# Altium PCB Tow_FOC.PcbDoc (part 2 of 3)
Units mil, origin at the board's own origin, x right, y up, seen from the top; angles counter-clockwise.
Board outline 3149.61 x 2165.35 mil, 4 copper layers (Top Layer, Layer 1, Layer 2, Bottom Layer), stack 23.756 mil thick; 186 components, 138 nets, 677 pads, 434 vias.
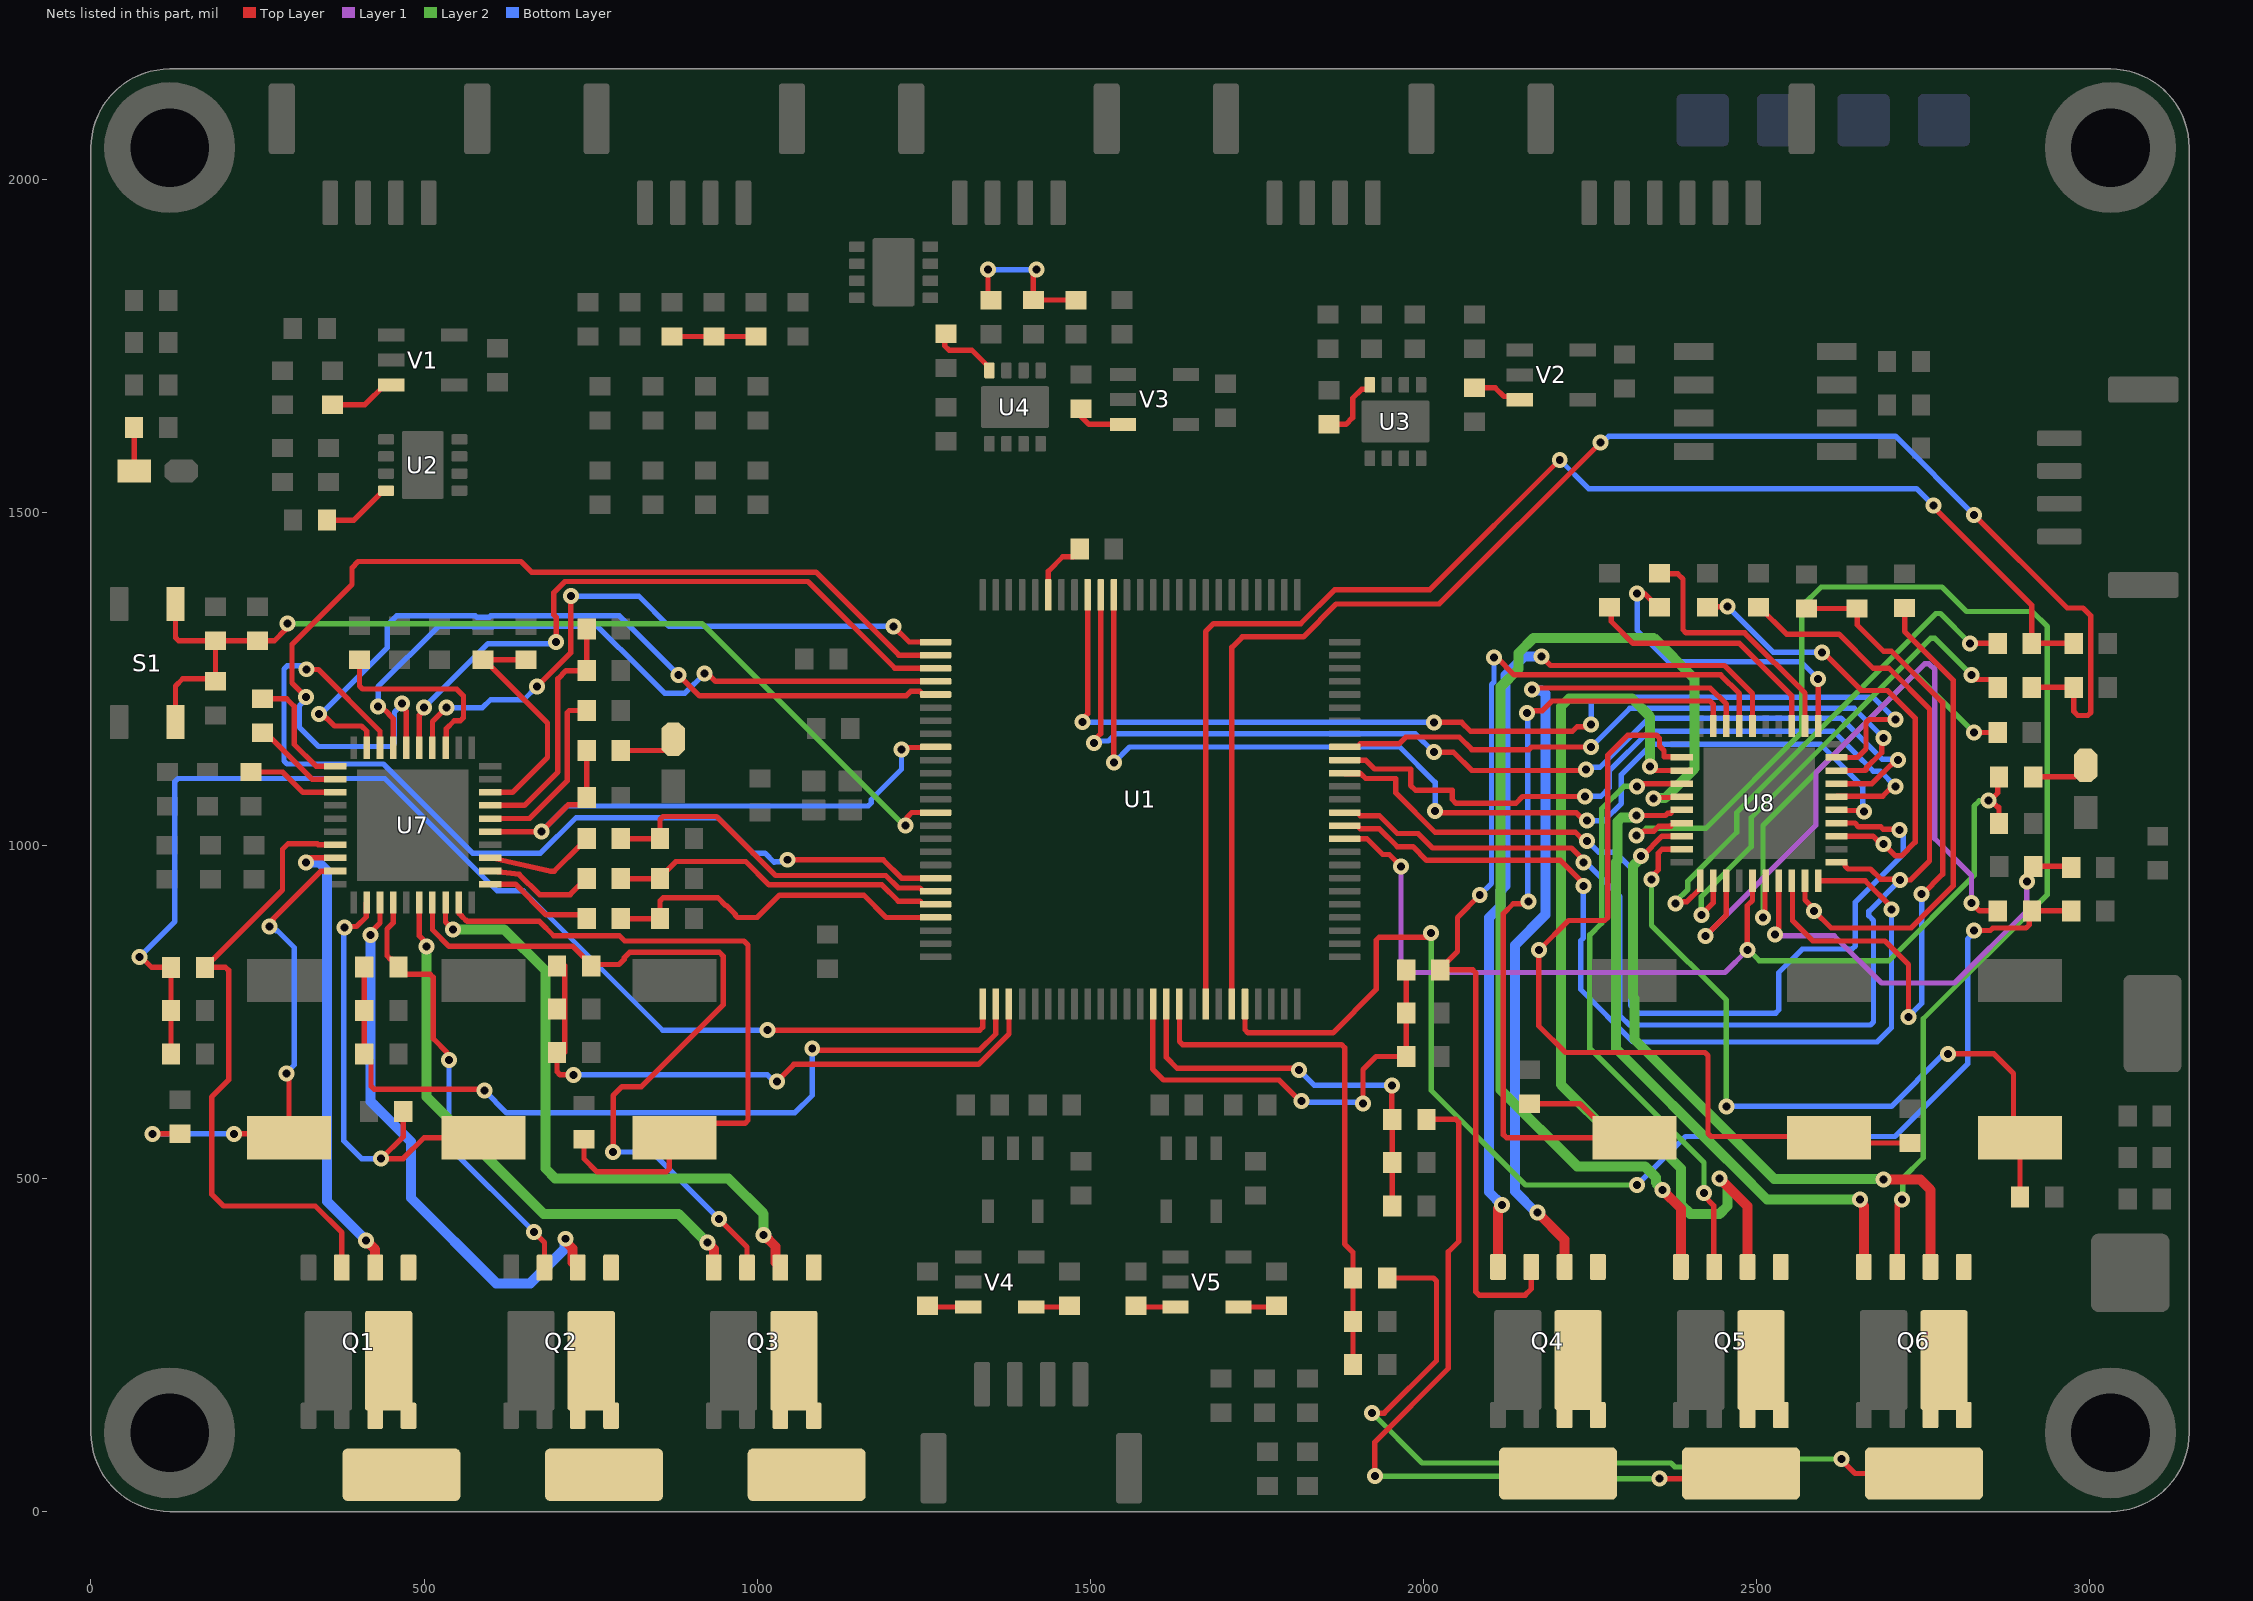
[diagram p4: the nets of this part, all layers, seen from the top]

## Via types
v1: diameter 24, hole 12, Top Layer to Bottom Layer, tented both sides, 434 vias

## Nets (pads, with @x,y where several pads share a name; then routed paths per layer and width w, separated by ;. In a path a pad name is that pad's centre, name@x,y a point inside that pad or via, vN(x,y) a via of type N, cw(c..) or ccw(c..) an arc to the next point about the centre after c; other vN are vias at no path point) (continued)
M1_GHC: Q3.4 U7.16 | length 849.9
  Top Layer w8: U7.16@492.87,914.22 492.87,863.82 503.94,852.75 v1(503.94,848.43)
  Top Layer w15: v1(925.2,403.54) 934.84,393.9 Q3.4@934.84,366.14
  Layer 2 w15: v1(503.94,848.43) 503.94,622.05 679.13,446.85 881.89,446.85 v1(925.2,403.54)
M1_GLA: Q1.2 U7.8 | length 709.4
  Top Layer w8: v1(322.83,974.41) 329.57,981.14 U7.8@366.89,981.14
  Top Layer w15: v1(412.9,407.13) 426.57,393.45 Q1.2@426.57,366.14
  Bottom Layer w15: v1(322.83,974.41) 342.1,974.41 354.33,962.18 354.33,465.69 v1(412.9,407.13)
M1_GLB: Q2.2 U7.13 | length 846.8
  Top Layer w8: v1(419.63,865.03) 419.63,869.36 433.97,883.7 433.97,914.06 U7.13@433.82,914.22
  Top Layer w15: v1(712.6,409.45) 712.6,405.12 722.9,394.82 722.9,373.95 Q2.2@730.71,366.14
  Bottom Layer w15: v1(419.63,865.03) 419.63,615.81 480.32,555.12 480.32,470.47 608.27,342.52 659.45,342.52 710.52,393.59 710.52,407.37 v1(712.6,409.45)
M1_GLC: Q3.2 U7.18 | length 953.4
  Top Layer w8: U7.18@532.24,914.22 532.24,885.08 v1(543.31,874.02)
  Top Layer w15: v1(1009.84,415.35) 1027.37,397.83 1027.37,373.61 Q3.2@1034.84,366.14
  Layer 2 w15: v1(543.31,874.02) 620.08,874.02 682.09,812.01 682.09,514.76 696.85,500 956.69,500 1009.84,446.85 v1(1009.84,415.35)
M1_IDRIVE: R43.2 R51.1 U7.27 | length 372.7
  Top Layer w8: U7.27@599.17,1059.89 599.25,1059.96 650.52,1059.96 700.79,1110.24 700.79,1249.89 713.19,1262.29 R43.2@744.09,1262.29 R51.1@744.09,1324.42
M1_INHA: U1.1 U7.34 | length 950.5
  Top Layer w8: U7.34@512.56,1146.5 512.56,1185.78 v1(533.46,1206.69) ; v1(669.29,1238.19) 720.31,1289.21 720.31,1373.85 v1(720.47,1374.02) ; v1(1204.72,1328.74) 1228.35,1305.12 U1.1@1267.72,1305.12
  Bottom Layer w8: v1(533.46,1206.69) 587.79,1206.69 599.61,1218.5 649.61,1218.5 v1(669.29,1238.19) ; v1(720.47,1374.02) 822.28,1374.02 867.56,1328.74 v1(1204.72,1328.74)
M1_INHB: U1.2 U7.36 | length 1515
  Top Layer w8: v1(322.83,1222.44) 301.69,1243.58 301.69,1301.69 391.73,1391.73 391.73,1416.57 401.11,1425.95 645.48,1425.95 661.42,1410.02 1088.02,1410.02 1212.6,1285.43 ; v1(466.54,1212.6) 466.54,1208.27 473.19,1201.62 U7.36@473.19,1146.5 ; 1214.57,1285.43 U1.2@1267.72,1285.43
  Bottom Layer w8: v1(322.83,1222.44) 322.83,1219.6 312.99,1209.75 312.99,1177.17 341.69,1148.47 451.02,1148.47 455.7,1153.15 455.7,1199.91 466.54,1210.74 v1(466.54,1212.6)
M1_INHC: U1.19 U7.38 | length 1447.9
  Top Layer w8: v1(323.69,1264.29) 324.1,1263.89 341.23,1263.89 433.82,1171.3 U7.38@433.82,1146.5 ; v1(1045.28,978.35) 1189.17,978.35 1216.73,950.79 U1.19@1267.72,950.79
  Bottom Layer w8: v1(323.69,1264.29) 318.53,1269.45 294.32,1269.45 289.63,1264.77 289.63,1126.73 294.32,1122.05 439.09,1122.05 572.95,988.19 674.81,988.19 727.96,1041.34 940.94,1041.34 994.09,988.19 1011.81,988.19 1025.59,974.41 1026.47,975.29 1042.21,975.29 v1(1045.28,978.35)
M1_INLA: U1.3 U7.35 | length 1011.7
  Top Layer w8: U7.35@492.87,1146.5 492.87,1195.23 500,1202.36 v1(500,1206.69) ; v1(698.31,1305.12) 698.31,1342.78 694.88,1346.21 694.88,1379.54 711.36,1396.02 1076.43,1396.02 1206.69,1265.75 U1.3@1267.72,1265.75
  Bottom Layer w8: v1(500,1206.69) 595.99,1302.68 695.87,1302.68 v1(698.31,1305.12)
M1_INLB: U1.4 U7.37 | length 1036.8
  Top Layer w8: v1(431.1,1208.66) 435.43,1208.66 447.84,1196.25 447.84,1195.86 453.5,1190.2 U7.37@453.5,1146.5 ; v1(921.26,1257.87) 925.59,1257.87 937.4,1246.06 U1.4@1267.72,1246.06
  Bottom Layer w8: v1(431.1,1208.66) 431.1,1238.19 521.65,1328.74 573.1,1328.74 573.67,1328.17 603.49,1328.17 604.06,1328.74 760.56,1328.74 827.01,1262.29 860.95,1228.35 891.73,1228.35 v1(921.26,1257.87)
M1_INLC: U1.5 U7.39 | length 1169.6
  Top Layer w8: v1(342.52,1196.85) 346.85,1196.85 353.03,1190.67 354.28,1190.67 365.81,1179.13 406.18,1179.13 414.13,1171.19 U7.39@414.13,1146.5 ; v1(881.89,1255.91) 913.39,1224.41 1223.68,1224.41 1230.41,1231.14 1244.25,1231.14 1249.02,1226.38 U1.5@1267.72,1226.38
  Bottom Layer w8: v1(342.52,1196.85) 345.09,1196.85 444.88,1296.64 444.88,1330.6 458.77,1344.49 577.16,1344.49 579.47,1342.17 597.7,1342.17 600.01,1344.49 793.31,1344.49 v1(881.89,1255.91)
M1_ISEN_A: C46.2 R40.1 U1.20 | length 549.5
  Top Layer w8: R40.1@795.28,1010 C46.2@854.1,1010 854.1,1038.62 858.78,1043.31 938.98,1043.31 1027.56,954.72 1192.99,954.72 1211.85,935.87 1243.41,935.87 1244.25,935.87 1249.02,931.1 U1.20@1267.72,931.1
M1_ISEN_B: C47.2 R41.1 U1.21 | length 510.9
  Top Layer w8: R41.1@795.28,950 C47.2@854.1,950 854.1,951.97 877.88,975.75 982.91,975.75 1017.94,940.72 1187.19,940.72 1211.73,916.18 1243.41,916.18 1244.25,916.18 1248.09,912.34 1266.8,912.34 U1.21@1267.72,911.42
M1_ISEN_C: C48.2 R44.1 U1.22 | length 541.8
  Top Layer w8: R44.1@795.28,890 C48.2@854.1,890 854.1,916.57 858.78,921.26 940.94,921.26 952.41,909.8 953.99,909.8 966.88,896.91 966.88,895.32 970.47,891.73 1000,891.73 1033.46,925.2 1159.94,925.2 1193.41,891.73 U1.22@1267.72,891.73
M1_MODE: R48.2 U7.26 | length 272
  Top Layer w8: U7.26@599.17,1040.2 599.25,1040.28 658.39,1040.28 714.79,1096.68 714.79,1199.02 718.05,1202.29 R48.2@744.09,1202.29
M1_NFAULT: R45.2 R46.2 U1.9 U7.25 | length 902.5
  Top Layer w8: U7.25@599.17,1020.52 v1(676.03,1020.52) 716.59,1061.07 735.31,1061.07 744.09,1069.85 R45.2@744.09,1071.82 R46.2@744.09,1142.29 ; v1(1216.54,1143.7) 1219.55,1146.72 1266.8,1146.72 U1.9@1267.72,1147.64
  Bottom Layer w8: v1(676.03,1020.52) 714.57,1059.06 1166.57,1059.06 1171.26,1063.74 1171.26,1068.9 1216.54,1114.17 v1(1216.54,1143.7)
M1_SHA: Q1.3 Q1.7 Q1.8 R31.2 TP5.1 U7.7 | length 965.7
  Top Layer w8: U7.7@366.89,1000.83 341.31,1000.83 339.82,1002.32 295.62,1002.32 287.4,994.09 287.4,933.07 183,828.67 181.04,828.67 171.26,818.89 R31.2@171.26,816.93 202.01,816.93 206.69,812.24 206.69,647.64 181.1,622.05 181.1,476.38 198.82,458.66 336.61,458.66 376.57,418.7 Q1.3@376.57,366.14
M1_SHB: Q2.3 Q2.7 Q2.8 R32.2 TP6.1 U7.14 | length 672.2
  Top Layer w8: U7.14@453.5,914.22 453.5,883.43 444.32,874.26 444.32,834.4 449.86,828.87 451.82,828.87 461.6,819.09 R32.2@461.6,817.12 ; R32.2@461.6,816.31 471.38,806.53 509.09,806.53 513.78,801.84 513.78,709.81 534.47,689.12 534.47,680.49 v1(537.53,677.43) ; v1(665.35,419.29) 680.71,403.94 Q2.3@680.71,366.14
  Bottom Layer w8: v1(537.53,677.43) 537.53,547.11 v1(665.35,419.29)
M1_SHC: Q3.3 Q3.7 Q3.8 R33.2 TP7.1 U7.17 | length 1181.1
  Top Layer w8: U7.17@512.56,914.22 512.56,873.27 537.4,848.43 723.37,848.43 750.74,821.06 792.56,821.06 800.7,829.2 800.7,831.58 808.85,839.72 943.12,839.72 948.98,833.87 948.98,760.62 826.15,637.8 797.24,637.8 783.82,624.37 v1(783.82,539.65) ; v1(942.91,438.98) 984.84,397.05 Q3.3@984.84,366.14
  Bottom Layer w8: v1(783.82,539.65) 842.24,539.65 v1(942.91,438.98)
M1_SOA: R40.2 U7.23 | length 168.5
  Top Layer w8: U7.23@599.17,981.14 605.16,980.22 689.96,961.13 695.22,961.13 697.37,963.28 732.35,998.26 734.32,998.26 744.1,1008.03 R40.2@744.1,1010
M1_SOB: R41.2 U7.22 | length 167.1
  Top Layer w8: U7.22@599.17,961.46 611.48,960.54 642.67,956.47 673.25,925.89 719.2,925.89 R41.2@743.31,950
M1_SOC: R44.2 U7.21 | length 166.4
  Top Layer w8: U7.21@599.17,941.77 636.97,941.77 683.07,895.67 738.43,895.67 R44.2@744.1,890
M1_SPA: C43.1 Q1.1 R37.2 U7.9 | length 728.1
  Top Layer w8: v1(92.52,566.93) C43.1@133.86,566.93 ; v1(214.57,566.93) 291.34,566.93 R37.2@297.24,561.02 297.24,653.54 v1(293.31,657.48) ; v1(267.72,877.95) 267.72,882.28 273.73,888.3 273.73,889.88 344.79,960.93 366.36,960.93 U7.9@366.89,961.46
  Bottom Layer w8: v1(92.52,566.93) v1(214.57,566.93) ; v1(267.72,877.95) 272.05,877.95 278.06,871.93 279.64,871.93 305.12,846.46 305.12,670.17 293.31,658.36 v1(293.31,657.48)
M1_SPB: C44.1 Q2.1 R38.2 U7.12 | length 699.9
  Top Layer w8: v1(380.85,876.84) 382.06,878.05 398.57,878.05 413.21,892.68 413.21,913.29 U7.12@414.13,914.22 ; C44.1@468.51,600.4 468.51,562.44 v1(435.67,529.61) 468.51,529.61 499.93,561.02 R38.2@589.17,561.02
  Bottom Layer w8: v1(380.85,876.84) 379.64,875.63 379.64,556.19 406.22,529.61 v1(435.67,529.61)
M1_SPC: C45.1 Q3.1 R39.2 U7.19 | length 1071.7
  Top Layer w8: U7.19@551.93,914.22 552.85,913.29 552.85,897.48 556.69,893.63 556.69,893.34 562.55,887.48 563.3,887.48 564.96,885.83 673.11,885.83 694.69,864.26 793.23,864.26 801.18,856.3 980.32,856.3 986.22,850.39 986.22,587.36 981.53,582.68 897.64,582.68 R39.2@875.98,561.02 868.11,553.15 868.11,514.53 863.43,509.84 759.84,509.84 740.16,529.52 C45.1@740.16,559.05
M1_VDS: R42.2 R50.1 U7.28 | length 358.8
  Top Layer w8: R50.1@588.19,1278.66 R50.1@590.16,1278.66 ; U7.28@599.17,1079.57 632.77,1079.57 685.26,1132.06 685.26,1183.56 R50.1@590.16,1278.66 ; R42.2@653.18,1278.67 R50.1@590.16,1278.66
M1_VSEN_A: C40.2 R31.1 R34.2 U1.26 | length 1876.5
  Top Layer w8: v1(72.83,832.68) 75.27,832.68 91.02,816.93 R31.1@120.07,816.93 ; R34.2@120.08,686.93 C40.2@120.08,751.93 R31.1@120.07,816.93 ; v1(1015.75,722.44) 1333.9,722.44 1338.58,727.13 U1.26@1338.58,761.81
  Bottom Layer w8: v1(72.83,832.68) 125.98,885.83 125.98,1095.71 130.67,1100.39 440.94,1100.39 609.55,931.79 648.92,931.79 858.27,722.44 v1(1015.75,722.44)
M1_VSEN_B: C41.2 R32.1 R35.2 U1.27 | length 1274.2
  Top Layer w8: R35.2@410.43,687.13 R32.1@410.42,817.12 ; R35.2@410.43,687.13 420.21,677.35 420.21,638.54 424.9,633.86 588.58,633.86 v1(590.55,631.89) ; v1(1082.68,694.88) 1085.04,692.52 1333.61,692.52 1358.27,717.17 U1.27@1358.27,761.81
  Bottom Layer w8: v1(590.55,631.89) 624.02,598.43 1056.34,598.43 1082.68,624.77 v1(1082.68,694.88)
M1_VSEN_C: C42.2 R33.1 R36.2 U1.28 | length 917.6
  Top Layer w8: R36.2@699.57,689.09 699.57,660.2 704.25,655.51 v1(724.41,655.51) ; C42.2@711.37,754.1 R33.1@711.37,819.09 ; R36.2@711.38,689.09 C42.2@711.38,754.09 ; v1(1029.53,645.67) 1055.12,671.26 1332.16,671.26 1377.95,717.06 U1.28@1377.95,761.81
  Bottom Layer w8: v1(724.41,655.51) 1015.36,655.51 1025.2,645.67 v1(1029.53,645.67)
M2_CAL: R68.1 U1.62 U8.31 | length 1984
  Top Layer w8: U1.62@1881.89,1049.21 1900.59,1049.21 1905.35,1044.45 1934.13,1044.45 1960.86,1017.72 1992.13,1017.72 2013.78,996.06 2222.21,996.06 2240.16,978.12 v1(2240.16,974.41) ; R68.1@2502.77,1357.4 2504.74,1357.4 2545.21,1316.93 2624.02,1316.93 2675.2,1265.75 2698.82,1265.75 2759.84,1204.72 2759.84,976.38 2731.41,947.95 v1(2715.66,947.95) 2714.31,949.3 2686.53,949.3 2671.26,964.57 2637.5,964.57 2632.81,969.25 2632.81,973.49 2631.89,974.41 U8.31@2620.08,974.41
  Bottom Layer w8: v1(2240.16,974.41) 2244.09,974.41 2295.28,923.23 2295.28,744.21 2309.17,730.31 2671.1,730.31 2675.79,735 2675.79,887.21 2668.67,894.32 2668.67,900.95 v1(2715.66,947.95)
M2_ENABLE: U1.61 U8.30 | length 1370.9
  Top Layer w8: U1.61@1881.89,1029.53 1900.59,1029.53 1905.35,1024.76 1934.01,1024.76 1960.74,998.03 1984.25,998.03 2004.92,977.36 2205.71,977.36 2240.16,942.91 v1(2240.16,938.98) ; U8.30@2592.52,946.85 2663.22,946.85 2702.76,907.32 v1(2702.76,903.54)
  Bottom Layer w8: v1(2240.16,938.98) 2240.16,861.02 2236.22,857.09 2236.22,783.46 2314.96,704.72 2681.1,704.72 2702.76,726.38 v1(2702.76,903.54)
M2_GAIN: R70.2 U8.29 | length 743.8
  Top Layer w8: U8.29@2572.83,946.85 2572.83,918.12 2586.61,904.34 v1(2586.61,901.57) 2612.2,875.98 2732.28,875.98 2795.28,938.98 2795.28,1248.03 2722.44,1320.86 R70.2@2722.44,1356.3
M2_GHA: Q4.4 U8.6 | length 1363.2
  Top Layer w8: v1(2177.17,1283.46) 2190.72,1269.91 2452.13,1269.91 2494.09,1227.94 U8.6@2494.09,1179.13
  Top Layer w15: Q4.4@2112.01,367.13 2112.01,454.6 v1(2117.75,460.35)
  Bottom Layer w15: v1(2117.75,460.35) 2098.43,479.67 2098.43,891.35 2116.14,909.07 2116.14,931.94 2123.49,939.3 2123.49,1255.57 2151.39,1283.46 v1(2177.17,1283.46)
M2_GHB: Q5.4 U8.15 | length 1662.5
  Top Layer w8: v1(2345.19,1070.18) 2346.92,1071.91 2386.87,1071.91 U8.15@2387.8,1072.83
  Top Layer w15: v1(2358.62,482.77) 2386.61,454.78 Q5.4@2386.61,367.13
  Layer 2 w15: v1(2345.19,1070.18) 2345.95,1070.94 2362.97,1070.94 2407.04,1115.02 2407.04,1250.19 2345.76,1311.46 2165.57,1311.46 2142.6,1288.5 2142.6,1264.65 2116.14,1238.19 2116.14,632.89 2230.88,518.16 2332.46,518.16 2348.87,501.76 2348.87,493.61 2358.62,483.85 v1(2358.62,482.77)
M2_GHC: Q6.4 U8.16 | length 1009.1
  Top Layer w8: v1(2319.73,1044.72) 2363.26,1044.72 2366.92,1048.39 2371.22,1048.39 2375.98,1053.15 U8.16@2387.8,1053.15
  Top Layer w15: v1(2655.51,468.5) 2655.51,464.17 2661.22,458.47 Q6.4@2661.22,367.13
  Layer 2 w15: v1(2319.73,1044.72) 2316.67,1041.66 2297.57,1041.66 2291.34,1035.43 2291.34,977.1 2289.17,974.93 2289.17,695.08 2456.25,528 2456.48,528 2472.88,511.6 2472.88,511.37 2515.75,468.5 v1(2655.51,468.5)
M2_GLA: Q4.2 U8.8 | length 1268.6
  Top Layer w8: v1(2163.39,1233.91) 2163.73,1234.25 2169.29,1234.25 2171.26,1236.22 2430.47,1236.22 2454.72,1211.96 U8.8@2454.72,1179.13
  Top Layer w15: v1(2171.26,448.82) 2212.01,408.07 Q4.2@2212.01,367.13
  Bottom Layer w15: v1(2163.39,1233.91) 2165.01,1232.28 2178.38,1232.28 2183.07,1227.6 2183.07,895.67 2137.8,850.39 2137.8,480.31 2169.29,448.82 v1(2171.26,448.82)
M2_GLB: Q5.2 U8.13 | length 1406.6
  Top Layer w8: v1(2340.55,1118.11) 2340.55,1116.89 2345.24,1112.2 U8.13@2387.8,1112.2
  Top Layer w15: v1(2444.88,500) 2486.61,458.27 Q5.2@2486.61,367.13
  Layer 2 w15: v1(2340.55,1118.11) 2340.55,1192.91 2312.99,1220.47 2218.41,1220.47 2206.69,1208.76 2206.69,640.75 2288.39,559.06 2342.52,559.06 2386.62,514.95 2386.62,460.82 2400.59,446.85 2444.88,446.85 2456.6,458.57 2456.6,487.2 2444.88,498.92 v1(2444.88,500)
M2_GLC: Q6.2 U8.18 | length 1009
  Top Layer w8: v1(2326.77,984.25) 2328.74,984.25 2358.27,1013.78 U8.18@2387.8,1013.78
  Top Layer w15: v1(2690.94,498.03) 2746.06,498.03 2761.22,482.87 Q6.2@2761.22,367.13
  Layer 2 w15: v1(2326.77,984.25) 2326.77,981.41 2314.61,969.25 2314.61,772.38 2316.93,770.07 2316.93,708.66 2526.57,499.02 v1@2691.93,499.02
M2_IDRIVE: R64.2 R72.1 U8.27 | length 665
  Top Layer w8: v1(2527.56,866.14) 2527.56,870.47 2533.46,876.38 U8.27@2533.46,946.85 ; v1(2905.76,945.63) 2905.76,958.9 R72.1@2915.36,968.5 2970.48,968.5 R64.2@2972.44,966.53
  Layer 1 w8: v1(2527.56,866.14) 2529.46,864.24 2616.67,864.24 2687.6,793.31 2797.24,793.31 2905.76,901.82 v1(2905.76,945.63)
M2_INHA: U1.65 U8.34 | length 1429.4
  Top Layer w8: U1.65@1881.89,1108.27 1882.81,1107.35 1906.43,1107.35 1913.57,1100.21 1958.66,1100.21 1958.66,1078.74 2017.72,1019.68 2228.09,1019.68 2241.38,1006.39 v1(2245.71,1006.39) ; U8.34@2620.08,1033.46 2647.67,1033.46 2653.36,1027.78 2686.57,1027.78 2690.38,1023.97 2713.83,1023.97 v1(2714.57,1023.23)
  Bottom Layer w8: v1(2245.71,1006.39) 2246.42,1006.39 2263.04,989.78 2287.78,989.78 2311.02,966.54 2311.02,759.84 2322.83,748.03 2528.78,748.03 2533.46,752.72 2533.46,809.06 2568.9,844.49 2643.72,844.49 2648.4,849.17 2648.4,914.9 2720.47,986.97 2720.47,1017.32 v1(2714.57,1023.23)
M2_INHB: U1.66 U8.36 | length 1065.2
  Top Layer w8: U1.66@1881.89,1127.95 1913.39,1127.95 1926.82,1114.52 1980.95,1114.52 1980.95,1089.91 1988.24,1082.62 2043.31,1082.62 2043.31,1068.9 2049.21,1062.99 2138.65,1062.99 2148.85,1073.19 v1(2242.61,1073.19) ; U8.36@2620.08,1072.83 2621,1073.76 2689.55,1073.76 2704.37,1088.58 v1(2708.66,1088.58)
  Bottom Layer w8: v1(2242.61,1073.19) 2243.13,1073.7 2266.61,1073.7 2279.53,1086.61 2279.53,1112.07 2338.65,1171.19 2615.46,1171.19 2646.41,1140.24 2675.26,1111.4 2685.85,1111.4 v1(2708.66,1088.58)
M2_INHC: U1.67 U8.38 | length 971.1
  Top Layer w8: U1.67@1881.89,1147.64 1900.59,1147.64 1905.35,1152.4 1963.54,1152.4 1973.78,1162.65 2053.89,1162.65 2072.83,1143.7 2158.27,1143.7 2162.21,1147.64 v1(2251.97,1147.64) ; U8.38@2620.08,1112.2 2663.39,1112.2 2664.67,1113.49 2664.67,1115.81 2687.88,1139.02 2687.88,1158.36 v1(2690.94,1161.42)
  Bottom Layer w8: v1(2251.97,1147.64) 2310.04,1205.71 2646.65,1205.71 v1(2690.94,1161.42)
M2_INLA: U1.90 U8.35 | length 1636.8
  Top Layer w8: v1(1535.43,1124.02) U1.90@1535.43,1375.98 ; v1(2017.72,1051.18) 2019.91,1048.99 2229.3,1048.99 2241.38,1036.91 v1(2245.71,1036.91) ; U8.35@2620.08,1053.15 2621,1052.23 2660.02,1052.23 v1(2661.42,1050.83)
  Bottom Layer w8: v1(1535.43,1124.02) 1559.06,1147.64 1964.57,1147.64 2017.72,1094.49 v1(2017.72,1051.18) ; v1(2245.71,1036.91) 2271.17,1036.91 2297.24,1062.99 2297.24,1106.3 2342.52,1151.57 2596.46,1151.57 2659.45,1088.58 2659.45,1052.8 v1(2661.42,1050.83)
M2_INLB: U1.91 U8.37 | length 1627.7
  Top Layer w8: v1(1505.91,1153.54) 1505.91,1157.87 1515.75,1167.72 U1.91@1515.75,1375.98 ; v1(2015.75,1139.76) 2045.28,1139.76 2072.83,1112.2 2242.13,1112.2 v1(2244.09,1114.17) ; U8.37@2620.08,1092.52 2673.23,1092.52 2690.57,1109.86 2691.09,1109.86 2709.19,1127.95 v1(2712.6,1127.95)
  Bottom Layer w8: v1(1505.91,1153.54) 1508.97,1156.6 1527.16,1156.6 1537.88,1167.32 1988.19,1167.32 v1(2015.75,1139.76) ; v1(2244.09,1114.17) 2247.16,1117.23 2264.89,1117.23 2338.6,1190.94 2626.97,1190.94 2688.6,1129.32 2711.24,1129.32 v1(2712.6,1127.95)
M2_INLC: U1.92 U8.39 | length 1610.5
  Top Layer w8: v1(1488.19,1185.04) 1488.19,1189.37 1496.41,1197.59 1496.41,1288.61 1496.06,1288.96 U1.92@1496.06,1375.98 ; v1(2015.75,1184.65) 2057.48,1184.65 2070.87,1171.26 2223.97,1171.26 2230.75,1178.04 2248.91,1178.04 v1(2251.97,1181.1) ; U8.39@2620.08,1131.89 2651.57,1131.89 2664.34,1144.65 2664.34,1184.29 2669.03,1188.98 v1(2708.66,1188.98)
  Bottom Layer w8: v1(1488.19,1185.04) 1488.39,1184.84 2015.55,1184.84 v1(2015.75,1184.65) ; v1(2251.97,1181.1) 2251.97,1214.13 2260.28,1222.44 2675.2,1222.44 v1(2708.66,1188.98)
M2_ISEN_A: C64.2 R61.1 U1.46 | length 1972.6
  Top Layer w8: U1.46@1732.28,761.81 1732.28,723.19 1736.97,718.5 1864.17,718.5 1929.13,783.46 1929.13,857.52 1933.82,862.2 2005.91,862.2 v1(2011.81,868.11) ; v1(2826.77,872.05) 2850.99,872.05 2854.77,875.83 2904.6,875.83 2909.45,880.67 2909.45,897.4 R61.1@2913.63,901.57 ; R61.1@2913.63,901.57 C64.2@2972.44,901.58
  Layer 2 w8: v1(2011.81,868.11) 2011.81,631.89 2153.54,490.16 v1(2320.87,490.16)
  Bottom Layer w8: v1(2320.87,490.16) 2393.7,562.99 2707.91,562.99 2816.93,672.01 2816.93,859.36 2826.77,869.2 v1(2826.77,872.05)
M2_ISEN_B: C65.2 R62.1 U1.45 | length 2342.1
  Top Layer w8: U1.45@1712.6,761.81 1712.6,1297.24 1728.35,1312.99 1819.88,1312.99 1869.09,1362.2 2023.62,1362.2 v1(2265.75,1604.33) ; v1(2826.77,1496.06) 2966.54,1356.3 2990.16,1356.3 3001.97,1344.49 3001.97,1199.57 2997.28,1194.88 2982.28,1194.88 2976.38,1200.78 C65.2@2976.38,1237.17 R62.1@2913.39,1237.17
  Bottom Layer w8: v1(2265.75,1604.33) 2268.59,1604.33 2278.43,1614.17 2708.66,1614.17 v1(2826.77,1496.06)
M2_ISEN_C: C66.2 R65.1 U1.43 | length 2117.8
  Top Layer w8: U1.43@1673.23,761.81 1673.23,1320.87 1685.04,1332.68 1815.94,1332.68 1867.13,1383.86 2009.84,1383.86 v1(2204.72,1578.74) ; v1(2765.75,1509.84) 2765.75,1507.87 2913.39,1360.23 R65.1@2913.39,1303.15 C66.2@2976.38,1303.15
  Bottom Layer w8: v1(2204.72,1578.74) 2248.03,1535.43 2740.16,1535.43 v1(2765.75,1509.84)
M2_MODE: R69.2 U8.26 | length 675.7
  Top Layer w8: v1(2509.84,891.73) 2512.86,894.75 2512.86,945.93 U8.26@2513.78,946.85 ; v1(2826.77,1169.29) R69.2@2862.21,1169.29
  Layer 2 w8: v1(2509.84,891.73) 2509.84,1029.79 2734.74,1254.69 2741.37,1254.69 v1(2826.77,1169.29)
M2_NFAULT: R66.2 R67.2 U1.60 U8.25 | length 1517.1
  Top Layer w8: U1.60@1881.89,1009.84 1915.35,1009.84 1938.98,986.22 1948.82,986.22 v1(1966.54,968.5) ; v1(2486.22,842.52) 2486.22,909.45 2494.09,917.32 U8.25@2494.09,946.85 ; R66.2@2864.17,1032.45 2864.17,1057.09 2862.6,1057.09 2852.75,1066.93 v1(2848.43,1066.93) 2850.39,1066.93 2862.2,1078.74 2862.2,1100.94 R67.2@2864.17,1102.91
  Layer 1 w8: v1(1966.54,968.5) 1966.54,813.74 1971.22,809.06 2452.76,809.06 v1(2486.22,842.52)
  Layer 2 w8: v1(2486.22,842.52) 2488.67,842.52 2504.41,826.77 2698.82,826.77 2826.77,954.72 2826.77,1059.06 2834.65,1066.93 v1(2848.43,1066.93)
M2_SHA: Q4.3 Q4.7 Q4.8 R52.2 TP8.1 U8.7 | length 1595.7
  Top Layer w8: R52.2@2025.59,812.99 2074.05,812.99 2078.74,808.31 2078.74,329.49 2083.43,324.8 2152.79,324.8 2162.01,334.02 Q4.3@2162.01,367.13 ; R52.2@2025.59,814.96 2051.18,840.55 2051.18,891.73 v1(2084.65,925.2) ; v1(2105.99,1281.8) 2110.32,1281.8 2136.22,1255.91 2446.33,1255.91 2474.41,1227.82 U8.7@2474.41,1179.13
  Bottom Layer w8: v1(2084.65,925.2) 2102.36,942.91 2102.36,1241.25 2105.99,1244.88 v1(2105.99,1281.8)
M2_SHB: Q5.3 Q5.7 Q5.8 R53.2 TP9.1 U8.14 | length 2096.3
  Top Layer w8: v1(1927.17,53.15) 1927.17,104.33 2037.4,214.57 2037.4,389.76 2053.15,405.51 2053.15,584.09 2048.46,588.78 R53.2@2004.68,588.78 ; v1(2320.87,1088.58) 2325.2,1088.58 2329.13,1092.52 U8.14@2387.8,1092.52 ; v1(2354.33,49.21) 2468.96,49.21 TP9.1@2476.83,57.09 ; v1(2421.26,478.35) 2421.26,474.02 2435.83,459.45 2435.83,367.91 Q5.3@2436.61,367.13
  Layer 2 w8: v1(1927.17,53.15) 2257.48,53.15 2261.42,49.21 v1(2354.33,49.21) ; v1(2320.87,1088.58) 2301.18,1088.58 2267.72,1055.12 2267.72,883.25 2250,865.54 2250,694.88 2378.44,566.44 2421.26,523.62 v1(2421.26,478.35)
M2_SHC: Q6.3 Q6.7 Q6.8 R54.2 TP10.1 U8.17 | length 3167.3
  Top Layer w8: v1(1923.23,147.64) 1923.34,147.75 1941.06,147.75 2019.69,226.38 2019.69,345.9 2015,350.59 R54.2@1945.62,350.59 ; v1(2319.73,1014.72) 2324.06,1014.72 2330.68,1021.34 2346.03,1021.34 2353.39,1028.7 2371.22,1028.7 2375.98,1033.46 U8.17@2387.8,1033.46 ; v1(2627.95,78.74) 2627.95,77.16 2648.03,57.09 2677.7,57.09 TP10.1@2679.67,55.12 ; Q6.3@2711.22,367.13 2711.22,460.83 v1(2718.5,468.11)
  Layer 2 w8: v1(1923.23,147.64) 1998.03,72.83 2371.66,72.83 2377.57,66.93 2494.69,66.93 2506.5,78.74 v1(2627.95,78.74) ; v1(2319.73,1014.72) 2323.67,1014.72 2334.54,1025.59 2424.08,1025.59 2567.78,1169.29 2567.78,1358.27 2597.31,1387.8 2778.42,1387.8 2815.2,1351.02 2914,1351.02 2936.66,1328.36 2936.66,925.96 2750.35,739.65 2750.35,530.99 2719.36,500 2719.36,468.97 v1(2718.5,468.11)
M2_SOA: R61.2 U8.23 | length 1076.9
  Top Layer w8: v1(2423.23,864.17) 2454.72,895.67 U8.23@2454.72,946.85 ; v1(2822.83,913.39) 2823,913.39 2834.81,901.57 R61.2@2862.44,901.57
  Layer 1 w8: v1(2423.23,864.17) 2589.37,1030.32 2589.37,1109.32 2752.46,1272.41 2759.09,1272.41 2767.72,1263.78 2767.72,1009.84 2822.83,954.72 v1(2822.83,913.39)
M2_SOB: R62.2 U8.22 | length 748.4
  Top Layer w8: v1(2417.32,895.67) 2435.04,913.39 U8.22@2435.04,946.85 ; v1(2822.83,1255.91) 2829.83,1248.91 2852.43,1248.91 2862.21,1239.13 R62.2@2862.21,1237.17
  Layer 2 w8: v1(2417.32,895.67) 2417.32,923.23 2492.13,998.03 2492.13,1041.34 2761.45,1310.66 2768.08,1310.66 v1(2822.83,1255.91)
M2_SOC: R65.2 U8.21 | length 766.6
  Top Layer w8: v1(2378.79,912.47) 2381.85,915.53 2395.85,915.53 2414.43,934.12 2414.43,945.93 U8.21@2415.35,946.85 ; v1(2820.87,1303.15) R65.2@2862.21,1303.15
  Layer 2 w8: v1(2378.79,912.47) 2378.79,915.43 2397.11,933.75 2397.11,946.32 2470.47,1019.68 2470.47,1049.21 2769.32,1348.06 2775.95,1348.06 v1(2820.87,1303.15)
M2_SPA: C61.1 Q4.1 R58.2 U8.9 | length 1359.8
  Top Layer w8: v1(2155.51,1198.82) 2158.57,1201.88 2178.35,1201.88 2193.01,1216.54 2430.35,1216.54 2435.04,1211.85 U8.9@2435.04,1179.13 ; v1(2157.48,915.35) 2154.42,912.29 2134.96,912.29 2120.08,897.41 2120.08,565.71 2124.77,561.02 R58.2@2316.93,561.02 2286.42,561.02 2235.24,612.2 C61.1@2159.45,612.2
  Bottom Layer w8: v1(2155.51,1198.82) 2156.5,1197.83 2156.5,916.34 v1(2157.48,915.35)
M2_SPB: C62.1 Q5.1 R59.2 U8.12 | length 1328.7
  Top Layer w8: U8.12@2387.8,1131.89 2386.87,1132.81 2361.28,1132.81 2361.28,1142.29 2354.33,1149.24 2354.33,1160.67 2349.64,1165.35 2307,1165.35 2276.94,1135.29 2276.94,891.86 2272.25,887.17 2217.88,887.17 v1(2173.23,842.52) 2173.23,729.1 2213.35,688.98 2422.48,688.98 2427.17,684.29 2427.17,567.68 2431.85,562.99 2606.89,562.99 R59.2@2608.86,561.02 2616.74,553.15 C62.1@2730.32,553.15
M2_SPC: C63.1 Q6.1 R60.2 U8.19 | length 1133.4
  Top Layer w8: v1(2342.52,948.82) 2342.52,953.15 2352.72,963.34 2352.72,988.43 2358.38,994.09 U8.19@2387.8,994.09 ; v1(2787.4,687.01) 2856.3,687.01 2885.83,657.48 2885.83,570.87 R60.2@2895.67,561.02 C63.1@2895.67,472.44
  Layer 2 w8: v1(2342.52,948.82) 2342.52,879.92 2454.72,767.72 v1(2454.72,608.27)
  Bottom Layer w8: v1(2454.72,608.27) 2702.76,608.27 2779.53,685.04 2785.43,685.04 v1(2787.4,687.01)
M2_VDS: R63.2 R71.1 U8.28 | length 1112.3
  Top Layer w8: U8.28@2553.15,946.85 2554.07,945.93 2554.07,886.87 2584.65,856.3 2692.91,856.3 2728.35,820.87 v1(2728.35,742.13) ; R71.1@2574.83,1355.43 R63.2@2651.22,1355.44 2651.22,1331.06 2690.94,1291.34 2702.76,1291.34 2779.53,1214.57 2779.53,956.69 v1@2749.02,926.18
  Bottom Layer w8: v1(2728.35,742.13) 2728.35,742.82 2748.03,762.5 v1(2748.03,927.17)
M2_VSEN_A: C58.2 R52.1 R55.2 U1.39 | length 689.6
  Top Layer w8: U1.39@1594.49,761.81 1593.57,760.89 1593.57,664.31 1610.24,647.64 1783.46,647.64 1814.96,616.14 v1(1816.93,616.14) ; v1(1909.45,612.2) 1909.45,663.39 1929.05,682.99 R55.2@1974.42,682.99 C58.2@1974.42,747.99 R52.1@1974.41,812.99
  Bottom Layer w8: v1(1816.93,616.14) 1818.9,614.17 1907.48,614.17 v1(1909.45,612.2)
M2_VSEN_B: C59.2 R53.1 R56.2 U1.40 | length 617.4
  Top Layer w8: U1.40@1614.17,761.81 1614.17,681.58 1630.4,665.35 1810.85,665.35 v1(1813.17,663.04) ; v1(1952.76,639.76) 1952.76,589.52 R53.1@1953.5,588.78 C59.2@1953.5,523.78 R56.2@1953.5,458.77
  Bottom Layer w8: v1(1813.17,663.04) 1836.44,639.76 v1(1952.76,639.76)
M2_VSEN_C: C60.2 R54.1 R57.2 U1.41 | length 789
  Top Layer w8: U1.41@1633.86,761.81 1633.86,705.47 1638.54,700.79 1877.2,700.79 1881.89,696.1 1881.89,401.57 1894.44,389.02 R54.1@1894.44,350.59 R57.2@1894.45,220.58
MCU_BOOT0: R12.1 U1.95 | length 97.7
  Top Layer w8: U1.95@1437.01,1375.98 1437.01,1411.42 1458.72,1433.13 1474.47,1433.13 1484.25,1442.91 R12.1@1484.25,1444.88
MCU_NRST: C13.1 R7.2 R11.1 S1.2 U1.14 | length 1528.1
  Top Layer w8: S1.2@126.97,1185.04 126.97,1239.17 137.8,1250 183.07,1250 C13.1@187,1246.07 R11.1@187.01,1307.08 ; S1.2@126.97,1362.2 126.97,1311.77 131.65,1307.08 R11.1@187.01,1307.08 ; v1(295.28,1332.68) 292.21,1329.62 292.21,1323.72 275.59,1307.09 R7.2@250,1307.09 R11.1@187.01,1307.08 ; v1(1222.44,1029.53) 1225.5,1032.59 1225.5,1042.62 1232.09,1049.21 U1.14@1267.72,1049.21
  Layer 2 w8: v1(295.28,1332.68) 917.32,1332.68 1220.47,1029.53 v1(1222.44,1029.53)
NetC9_1: C9.1 U2.8 | length 106.9
  Top Layer w8: C9.1@354.33,1488.19 394.69,1488.19 438.98,1532.48 U2.8@442.91,1532.48
NetC11_1: C11.1 U3.8 | length 105.4
  Top Layer w8: C11.1@1858.27,1631.89 1883.86,1631.89 1893.93,1641.96 1893.93,1671.14 1907.2,1684.41 1916.85,1684.41 1919.72,1687.28 U3.8@1919.72,1691.22
NetC18_2: C18.2 R14.2 R15.1 | length 231.8
  Top Layer w8: v1(1346.46,1864.17) 1346.46,1822.76 R14.2@1350.76,1818.46 ; v1(1419.29,1864.17) 1419.29,1861.94 1414.5,1857.15 R15.1@1414.5,1818.47 C18.2@1478.26,1818.46
  Bottom Layer w8: v1(1346.46,1864.17) v1(1419.29,1864.17)
NetC21_2: C21.2 R22.1 R23.1 | length 126
  Top Layer w8: R23.1@872.05,1763.78 R22.1@935.04,1763.78 C21.2@998.03,1763.78
NetC33_1: C33.1 U7.3 | length 139.5
  Top Layer w8: C33.1@239.99,1110.01 287.77,1110.01 318.21,1079.57 U7.3@366.89,1079.57
NetC37_1: C37.1 U7.2 | length 134.9
  Top Layer w8: C37.1@262.42,1168.82 262.42,1166.09 269.46,1159.04 272.2,1159.04 331.98,1099.26 U7.2@366.89,1099.26
NetC37_2: C37.2 U7.1 | length 184.5
  Top Layer w8: C37.2@257.72,1220 293.78,1220 305.12,1208.66 305.12,1151.57 337.75,1118.94 U7.1@366.89,1118.94
NetC38_2: C38.2 U7.33 | length 295.8
  Top Layer w8: C38.2@403.18,1278.67 403.18,1239.28 407.87,1234.6 548.87,1234.6 559.06,1224.41 559.06,1191.69 554.37,1187.01 545.28,1187.01 533.16,1174.89 533.16,1147.42 U7.33@532.24,1146.5
NetC51_1: C51.1 U8.3 | length 385
  Top Layer w8: C51.1@2279.52,1357.4 2281.8,1355.12 2281.8,1336.31 2314.96,1303.15 2474.41,1303.15 2553.15,1224.41 U8.3@2553.15,1179.13
NetC55_1: C55.1 U8.2 | length 386.9
  Top Layer w8: C55.1@2354.33,1408.59 2355.44,1407.48 2381.89,1407.48 2389.76,1399.61 2389.76,1323.58 2394.45,1318.9 2482.28,1318.9 2572.83,1228.35 U8.2@2572.83,1179.13
NetC55_2: C55.2 U8.1 | length 469.8
  Top Layer w8: v1(2320.87,1377.95) 2331.82,1377.95 2352.37,1357.41 C55.2@2354.33,1357.41 ; U8.1@2592.52,1179.13 v1(2592.52,1250)
  Bottom Layer w8: v1(2320.87,1377.95) 2320.87,1322.83 2368.11,1275.59 2566.93,1275.59 v1(2592.52,1250)
NetC56_2: C56.2 U8.33 | length 707.7
  Top Layer w8: C56.2@2426.39,1357.41 2427.25,1358.27 v1(2456.69,1358.27) ; v1@2598.19,1291.57 2657.48,1232.28 2696.85,1232.28 2738.19,1190.95 2738.19,1004.69 2717.75,984.25 2708.66,984.25 v1(2690.94,1001.97) 2686.62,1001.97 2674.8,1013.78 U8.33@2620.08,1013.78
  Bottom Layer w8: v1(2456.69,1358.27) 2525.37,1289.59 2598.2,1289.59 v1(2598.43,1289.37)
NetLED1_1: LED1.1 R29.2 | length 65.2
  Top Layer w8: R29.2@64.61,1626.93 64.76,1626.78 LED1.1@64.76,1561.77
NetLED2_2: LED2.2 R46.1 | length 86.8
  Top Layer w8: R46.1@795.28,1142.29 858.54,1142.29 874.02,1157.77 LED2.2@874.02,1159.45
NetLED3_2: LED3.2 R67.1 | length 86.5
  Top Layer w8: R67.1@2915.35,1102.91 2978.02,1102.91 2994.09,1118.99 LED3.2@2994.09,1120.08
NetR4_2: R4.2 V1.3 | length 100.8
  Top Layer w8: R4.2@362.2,1661.42 411.42,1661.42 440.94,1690.94 V1.3@450.79,1690.94
NetR10_2: R10.2 V2.3 | length 75.2
  Top Layer w8: R10.2@2077.09,1686.81 2107.84,1686.81 2120.98,1673.66 2140,1673.66 V2.3@2144.84,1668.82
NetR17_2: R17.2 V3.3 | length 75.8
  Top Layer w8: R17.2@1486.22,1655.52 1486.22,1643.65 1497.98,1631.89 V3.3@1545.28,1631.89
NetR18_1: R18.1 U4.8 | length 103.4
  Top Layer w8: R18.1@1283.46,1767.72 1281.5,1765.75 1281.5,1749.95 1288.13,1743.32 1322.11,1743.32 1348.62,1716.81 U4.8@1348.62,1712.87
NetR25_1: R25.1 V4.4 | length 57.9
  Top Layer w8: V4.4@1411.42,307.09 1466.54,307.09 R25.1@1468.51,309.05
NetR26_2: R26.2 V4.3 | length 61.8
  Top Layer w8: R26.2@1255.9,309.06 1257.87,307.09 V4.3@1316.93,307.09
NetR27_1: R27.1 V5.4 | length 57.9
  Top Layer w8: V5.4@1722.44,307.09 1777.56,307.09 R27.1@1779.53,309.05
NetR28_2: R28.2 V5.3 | length 59.9
  Top Layer w8: R28.2@1568.89,309.06 1570.87,307.09 V5.3@1627.95,307.09